# EAGLE board Bot_68040_mk2a (EAGLE 6.4)
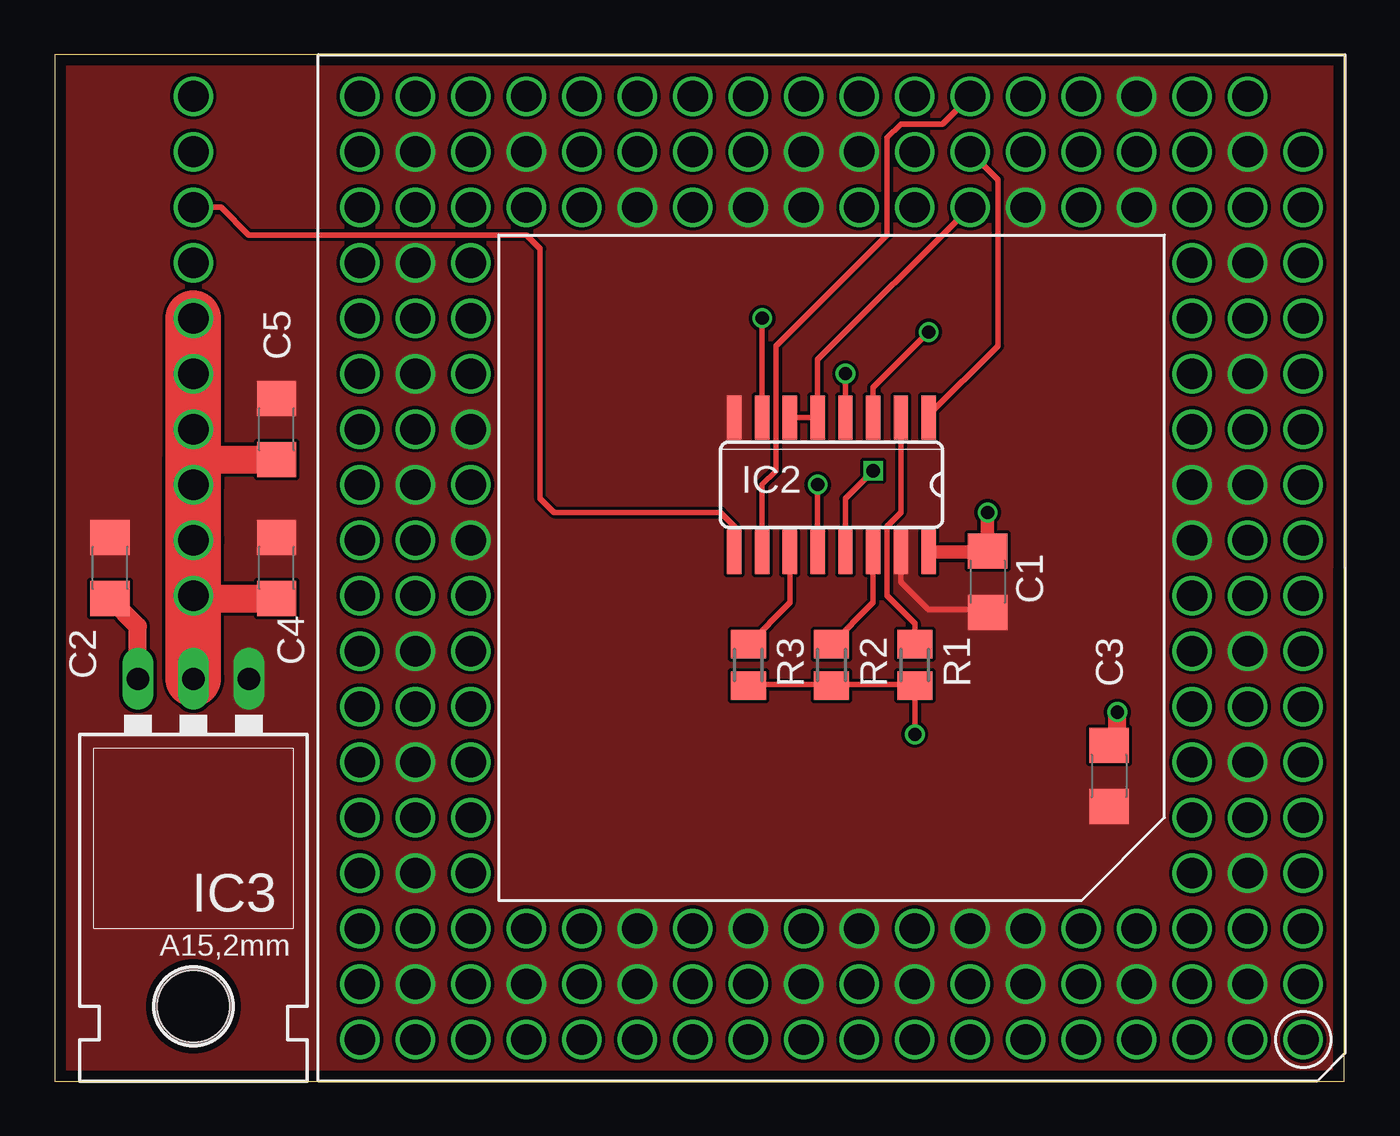
[diagram p0: board, top side]
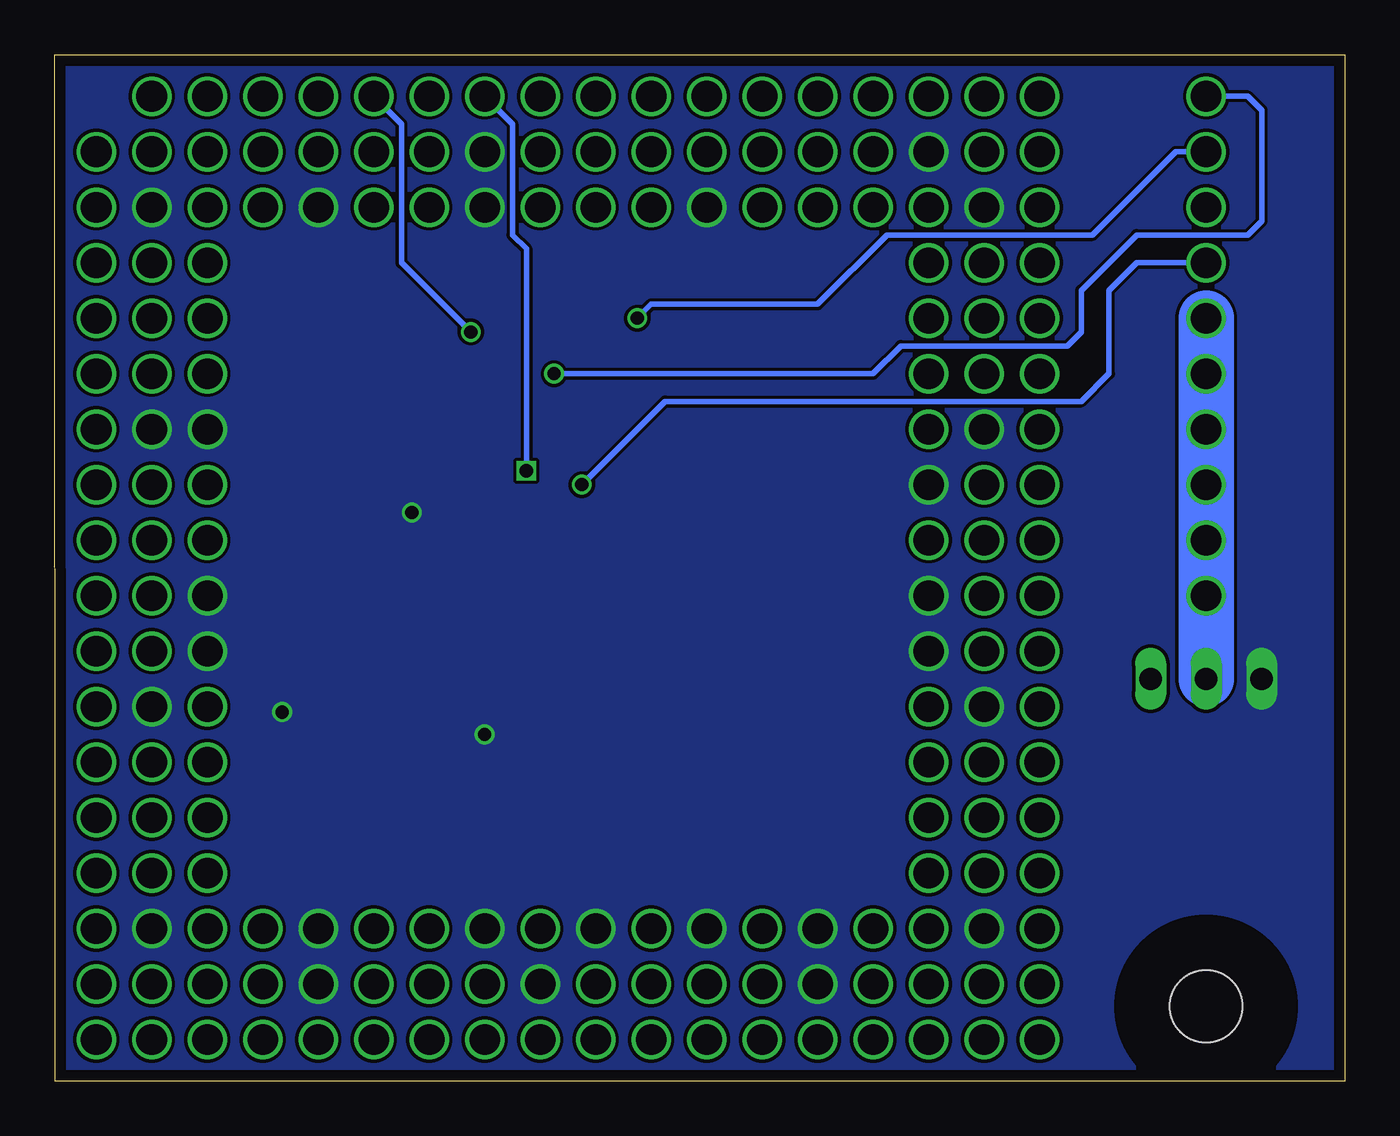
[diagram p1: board, bottom side, seen from below]

Size 59.05 x 46.99 mm. Coordinates in mm from the lower left corner, seen from the top.
Outline: 0,0 59.03,0 59.05,46.99 0,46.99 0,0
Copper layers (1*16): Top 0.035mm / dielectric 1.5mm / Bottom 0.035mm
Design rules "leiton *": minimum track width 6mil, minimum drill 0.3mm, track to track 6mil, track to pad 6mil, pad to pad 6mil, via to via 6mil, smd to smd 6mil, copper to edge 20mil, drill to drill 8mil, minimum pad ring 8mil, minimum via ring 6mil, stop-mask expansion 3mil, vias tented up to drill 0mil, thermal gap 8mil

## Footprints (pad centres in the part's own frame; a part is rotated, then mirrored left to right if it is on the bottom)
C1206 = smd 1.6 x 1.8: 1 -1.4,0; 2 1.4,0
PGA179_BIG = drill 1.4 pad 1.7: A01 -21.59,21.59; A02 -19.05,21.59; A03 -16.51,21.59; A04 -13.97,21.59; A05 -11.43,21.59; A06 -8.89,21.59; A07 -6.35,21.59; A08 -3.81,21.59; A09 -1.27,21.59; A10 1.27,21.59; A11 3.81,21.59; A12 6.35,21.59; A13 8.89,21.59; A14 11.43,21.59; A15 13.97,21.59; A16 16.51,21.59; A17 19.05,21.59; A18 21.59,21.59; B01 -21.59,19.05; B02 -19.05,19.05; B03 -16.51,19.05; B04 -13.97,19.05; B05 -11.43,19.05; B06 -8.89,19.05; B07 -6.35,19.05; B08 -3.81,19.05; B09 -1.27,19.05; B10 1.27,19.05; B11 3.81,19.05; B12 6.35,19.05; B13 8.89,19.05; B14 11.43,19.05; B15 13.97,19.05; B16 16.51,19.05; B17 19.05,19.05; B18 21.59,19.05; C01 -21.59,16.51; C02 -19.05,16.51; C03 -16.51,16.51; C04 -13.97,16.51; C05 -11.43,16.51; C06 -8.89,16.51; C07 -6.35,16.51; C08 -3.81,16.51; C09 -1.27,16.51; C10 1.27,16.51; C11 3.81,16.51; C12 6.35,16.51; C13 8.89,16.51; C14 11.43,16.51; C15 13.97,16.51; C16 16.51,16.51; C17 19.05,16.51; C18 21.59,16.51; D01 -21.59,13.97; D02 -19.05,13.97; D03 -16.51,13.97; D16 16.51,13.97; D17 19.05,13.97; D18 21.59,13.97; E01 -21.59,11.43; E02 -19.05,11.43; E03 -16.51,11.43; E16 16.51,11.43; E17 19.05,11.43; E18 21.59,11.43; F01 -21.59,8.89; F02 -19.05,8.89; F03 -16.51,8.89; F16 16.51,8.89; F17 19.05,8.89; F18 21.59,8.89; G01 -21.59,6.35; G02 -19.05,6.35; G03 -16.51,6.35; G16 16.51,6.35; G17 19.05,6.35; G18 21.59,6.35; H01 -21.59,3.81; H02 -19.05,3.81; H03 -16.51,3.81; H16 16.51,3.81; H17 19.05,3.81; H18 21.59,3.81; J01 -21.59,1.27; J02 -19.05,1.27; J03 -16.51,1.27; J16 16.51,1.27; J17 19.05,1.27; J18 21.59,1.27; K01 -21.59,-1.27; K02 -19.05,-1.27; K03 -16.51,-1.27; K16 16.51,-1.27; K17 19.05,-1.27; K18 21.59,-1.27; L01 -21.59,-3.81; L02 -19.05,-3.81; L03 -16.51,-3.81; L16 16.51,-3.81; L17 19.05,-3.81; L18 21.59,-3.81; M01 -21.59,-6.35; M02 -19.05,-6.35; M03 -16.51,-6.35; M16 16.51,-6.35; M17 19.05,-6.35; M18 21.59,-6.35; N01 -21.59,-8.89; N02 -19.05,-8.89; N03 -16.51,-8.89; N16 16.51,-8.89; N17 19.05,-8.89; N18 21.59,-8.89; P01 -21.59,-11.43; P02 -19.05,-11.43; P03 -16.51,-11.43; P16 16.51,-11.43; P17 19.05,-11.43; P18 21.59,-11.43; Q01 -21.59,-13.97; Q02 -19.05,-13.97; Q03 -16.51,-13.97; Q16 16.51,-13.97; Q17 19.05,-13.97; Q18 21.59,-13.97; R01 -21.59,-16.51; R02 -19.05,-16.51; R03 -16.51,-16.51; R04 -13.97,-16.51; R05 -11.43,-16.51; R06 -8.89,-16.51; R07 -6.35,-16.51; R08 -3.81,-16.51; R09 -1.27,-16.51; R10 1.27,-16.51; R11 3.81,-16.51; R12 6.35,-16.51; R13 8.89,-16.51; R14 11.43,-16.51; R15 13.97,-16.51; R16 16.51,-16.51; R17 19.05,-16.51; R18 21.59,-16.51; S01 -21.59,-19.05; S02 -19.05,-19.05; S03 -16.51,-19.05; S04 -13.97,-19.05; S05 -11.43,-19.05; S06 -8.89,-19.05; S07 -6.35,-19.05; S08 -3.81,-19.05; S09 -1.27,-19.05; S10 1.27,-19.05; S11 3.81,-19.05; S12 6.35,-19.05; S13 8.89,-19.05; S14 11.43,-19.05; S15 13.97,-19.05; S16 16.51,-19.05; S17 19.05,-19.05; S18 21.59,-19.05; T02 -19.05,-21.59; T03 -16.51,-21.59; T04 -13.97,-21.59; T05 -11.43,-21.59; T06 -8.89,-21.59; T07 -6.35,-21.59; T08 -3.81,-21.59; T09 -1.27,-21.59; T10 1.27,-21.59; T11 3.81,-21.59; T12 6.35,-21.59; T13 8.89,-21.59; T14 11.43,-21.59; T15 13.97,-21.59; T16 16.51,-21.59; T17 19.05,-21.59; T18 21.59,-21.59
SO16 = smd 0.66 x 2.032: 1 -4.445,-3.073; 2 -3.175,-3.073; 3 -1.905,-3.073; 4 -0.635,-3.073; 5 0.635,-3.073; 6 1.905,-3.073; 7 3.175,-3.073; 8 4.445,-3.073; 9 4.445,3.073; 10 3.175,3.073; 11 1.905,3.073; 12 0.635,3.073; 13 -0.635,3.073; 14 -1.905,3.073; 15 -3.175,3.073; 16 -4.445,3.073
317TL = drill 1.016 long: 1 -2.54,-3.81; 2 0,-3.81; 3 2.54,-3.81 | hole 3.302: 0,11.176
M0805 = smd 1.3 x 1.6: 1 -0.95,0; 2 0.95,0
10-PIN-1.4HOLES = drill 1.4: P$1 -11.43,0; P$2 -8.89,0; P$3 -6.35,0; P$4 -3.81,0; P$5 -1.27,0; P$6 1.27,0; P$7 3.81,0; P$8 6.35,0; P$9 8.89,0; P$10 11.43,0

## Placement (x,y rotation side)
C1  100n  [C1206]  42.7,22.86 270 top
C2  100n  [C1206]  2.54,23.5 90 top
C3  10u  [C1206]  48.26,13.97 270 top
C4  100n  [C1206]  10.16,23.5 90 top
C5  10u  [C1206]  10.16,29.84 90 top
IC1  [PGA179_BIG]  35.56,23.5 180 top
IC2  74F257  [SO16]  35.56,27.3 180 top
IC3  LT1084  [317TL]  6.35,14.61 180 top
R1  4k7  [M0805]  39.37,19.05 270 top
R2  4k7  [M0805]  35.56,19.05 270 top
R3  4k7  [M0805]  31.75,19.05 270 top
U$1  10POL  [10-PIN-1.4HOLES]  6.35,33.66 270 top

## Library data of the parts
C1-C5 R1-R3 = rcl
IC1 = MC680x0
IC2 = 74xx-us
IC3 = v-reg
U$1 = 10pol

## Nets
40_BCLK: IC1.R07 IC2.5 IC2.6
40_IPL0: IC1.T08 IC2.13
40_IPL1: IC1.T07 IC2.10
40_IPL2: IC1.T06 IC2.3
40_RSTI: IC1.S07 IC2.1
60_CLKEN: IC2.7 U$1.P$2
60_IPL0: IC2.12 U$1.P$4
60_IPL1: IC2.9 U$1.P$3
60_IPL2: IC2.4 U$1.P$1
+3V3: C4.1 C5.1 IC3.2 U$1.P$5 U$1.P$6 U$1.P$7 U$1.P$8 U$1.P$9 U$1.P$10
GND: C1.2 C2.2 C3.2 C4.2 C5.2 IC1.B02 IC1.B04 IC1.B06 IC1.B08 IC1.B10 IC1.B13 IC1.B15 IC1.B17 IC1.C06 IC1.C07 IC1.C09 IC1.C11 IC1.C13 IC1.D02 IC1.D17 IC1.F02 IC1.F17 IC1.H02 IC1.H17 IC1.K03 IC1.K16 IC1.L02 IC1.L03 IC1.L17 IC1.M16 IC1.N02 IC1.N17 IC1.Q02 IC1.Q17 IC1.R04 IC1.R06 IC1.R10 IC1.R11 IC1.R13 IC1.S02 IC1.S09 IC1.S10 IC1.S15 IC1.S17 IC1.T04 IC2.8 IC2.15 IC3.1
N$1: IC2.2 R1.1
N$2: IC2.11 R3.1
N$3: IC2.14 R2.1
VCC: C1.1 C2.1 C3.1 IC1.B05 IC1.B09 IC1.B14 IC1.C02 IC1.C05 IC1.C08 IC1.C10 IC1.C12 IC1.C14 IC1.C17 IC1.G02 IC1.G17 IC1.H03 IC1.H16 IC1.J03 IC1.J16 IC1.L16 IC1.M02 IC1.M03 IC1.M17 IC1.R02 IC1.R05 IC1.R08 IC1.R12 IC1.R17 IC1.S08 IC1.S16 IC2.16 IC3.3 R1.2 R2.2 R3.2

## Tracks (layer width: path | path; a pad name or v marks a point on that pad's centre or on a via)
40_BCLK
  Top 0.254: 33.66,30.35 IC2.6 IC2.5 34.92,33.02 IC1.R07
40_IPL0  (via drill 0.6)
  Top 0.254: v37.47,27.94 36.2,26.67 IC2.13
  Bottom 0.254: IC1.T08 38.1,43.81 38.1,38.73 37.47,38.1 v37.47,27.94
40_IPL1
  Top 0.254: IC1.T07 40.64,43.81 38.73,43.81 38.1,43.18 38.1,38.73 33.02,33.66 33.02,27.94 32.38,27.3 IC2.10
40_IPL2  (via drill 0.6)
  Top 0.254: v40.01,34.29 37.47,31.75 IC2.3
  Bottom 0.254: IC1.T06 43.18,43.81 43.18,37.47 v40.01,34.29
40_RSTI
  Top 0.254: IC2.1 40.01,30.48 43.18,33.66 43.18,41.27 IC1.S07
60_CLKEN  (via drill 0.6)
  Top 0.254: v32.38,34.92 IC2.7
  Bottom 0.254: U$1.P$2 7.75,42.55 11.56,38.73 20.95,38.73 24.13,35.56 31.75,35.56 v32.38,34.92
60_IPL0  (via drill 0.6)
  Top 0.254: 34.92,24.26 IC2.12 v34.92,27.3
  Bottom 0.254: U$1.P$4 9.53,37.47 10.79,36.2 10.79,32.38 12.06,31.11 31.11,31.11 v34.92,27.3
60_IPL1
  Top 0.254: IC2.9 31.11,25.4 30.48,26.04 22.86,26.04 22.23,26.67 22.23,38.1 21.59,38.73 8.89,38.73 7.62,40.01 U$1.P$3
60_IPL2  (via drill 0.6)
  Top 0.254: v36.2,32.38 IC2.4
  Bottom 0.254: v36.2,32.38 21.59,32.38 20.32,33.66 12.7,33.66 12.06,34.29 12.06,36.2 9.53,38.73 4.45,38.73 3.81,39.37 3.81,44.45 4.45,45.09 U$1.P$1
+3V3
  Top 1.27: C5.1 6.99,28.45 6.99,28.57 6.35,28.57 | C4.1 6.35,22.09 U$1.P$10 | U$1.P$8 U$1.P$7
  Top 2.54: IC3.2 U$1.P$10 U$1.P$9 U$1.P$8 6.35,28.57 U$1.P$7 U$1.P$6 U$1.P$5
  Bottom 2.54: IC3.2 U$1.P$5
GND
  Top 0.254: IC2.15 38.73,22.86 40.01,21.59 42.57,21.59 C1.2
  pour Top (no thermals): 0,46.99 0,0 59.05,0 59.05,46.99
N$1
  Top 0.254: 39.37,20.07 R1.1 39.37,20.95 38.1,22.23 38.1,25.4 38.73,26.04 IC2.2
N$2
  Top 0.254: 31.75,20.07 R3.1 33.66,21.91 IC2.11
N$3
  Top 0.254: 35.56,20.07 R2.1 37.47,21.91 IC2.14
VCC  (via drill 0.6, 0.61)
  Top 0.254: 35.56,18.16 31.75,18.16 R3.2 | 35.56,18.16 39.37,18.16 R1.2 v39.37,15.88 | 35.56,18.16 R2.2 | 2.54,21.97 C2.1 | 48.64,15.88 48.26,15.49 C3.1
  Top 0.61: IC2.16 42.67,24.23 C1.1 v42.7,26.04
  Top 0.813: 48.64,15.88 v48.64,16.89 | IC3.3 3.81,20.82 C2.1
  pour Bottom (no thermals): 0,46.99 0,0 59.05,0 59.05,46.99